# EAGLE board Tarjeta de distribuci�n (EAGLE 5.06)
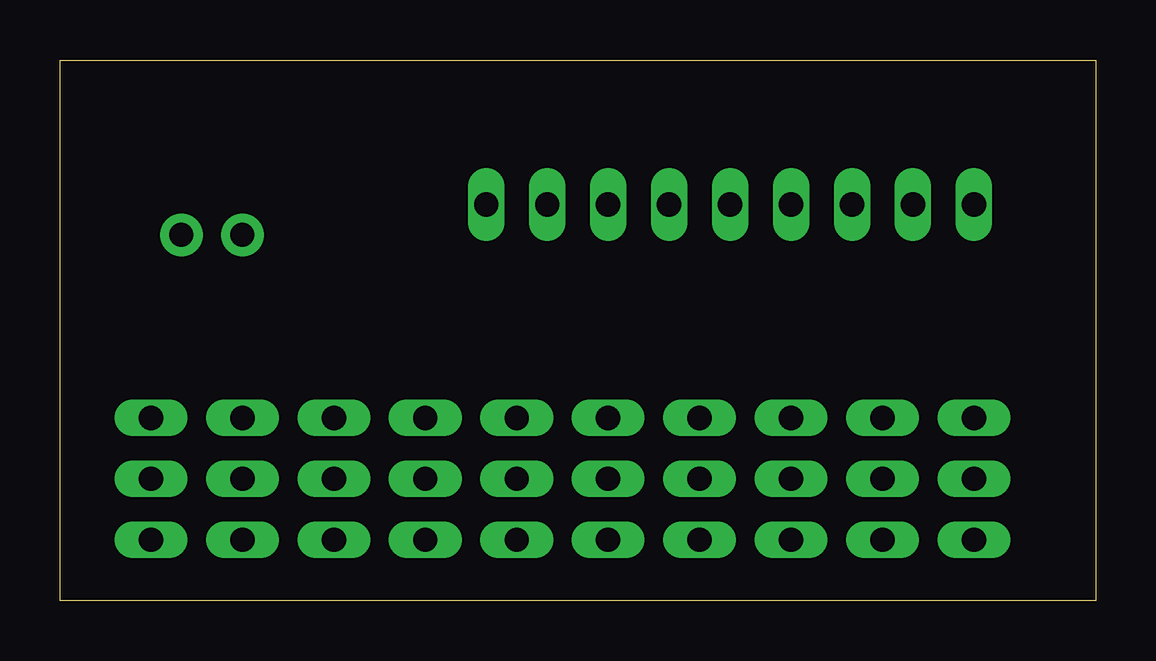
[diagram p0: board, top side]
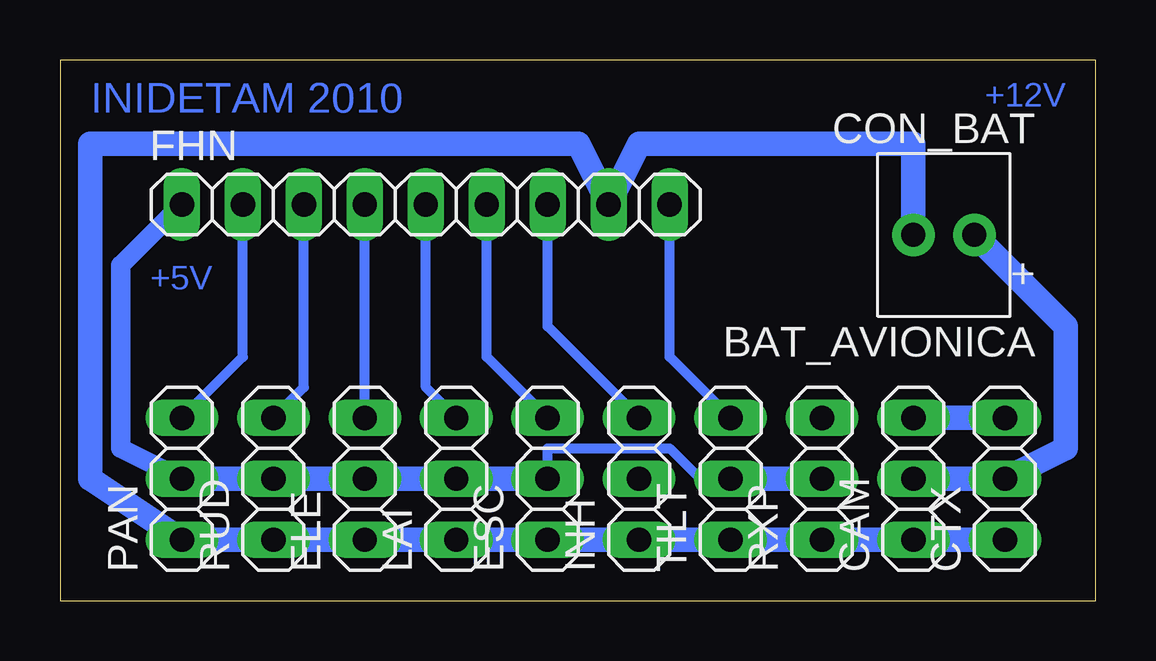
[diagram p1: board, bottom side, seen from below]

Size 43.16 x 22.53 mm. Coordinates in mm from the lower left corner, seen from the top.
Outline: 43.16,0 0,0 0,22.53 43.16,22.53 43.16,0
Copper layers (1*16): Top 0.035mm / dielectric 1.5mm / Bottom 0.035mm
Design rules "default": minimum track width 10mil, minimum drill 24mil, track to track 8mil, track to pad 8mil, pad to pad 8mil, via to via 8mil, smd to smd 8mil, copper to edge 40mil, drill to drill 8mil, minimum pad ring 10mil, minimum via ring 8mil, stop-mask expansion 4mil, vias tented up to drill 0mil, thermal gap 10mil

## Footprints (pad centres in the part's own frame; a part is rotated, then mirrored left to right if it is on the bottom)
CON_BAT = drill 1 pad 1.778 round: 1 -1.27,0; 2 1.27,0
1X03 = drill 1.016 long: 1 -2.54,0; 2 0,0; 3 2.54,0
1X09 = drill 1.016 long: 1 -10.16,0; 2 -7.62,0; 3 -5.08,0; 4 -2.54,0; 5 0,0; 6 2.54,0; 7 5.08,0; 8 7.62,0; 9 10.16,0

## Placement (x,y rotation side)
BAT_AVIONICA  CON_BAT  [CON_BAT]  6.33,15.24 180 bottom
CAM  [1X03]  7.6,5.08 90 bottom
CTX  [1X03]  3.79,5.08 90 bottom
ELE  [1X03]  30.46,5.08 90 bottom
ESC  [1X03]  22.84,5.08 90 bottom
FHN  [1X09]  27.92,16.51 0 bottom
INH  [1X03]  19.03,5.08 90 bottom
LAI  [1X03]  26.65,5.08 90 bottom
PAN  [1X03]  38.08,5.08 90 bottom
RUD  [1X03]  34.27,5.08 90 bottom
RXP  [1X03]  11.41,5.08 90 bottom
TILT  [1X03]  15.22,5.08 90 bottom

## Library data of the parts
BAT_AVIONICA = Conector bateria
CAM CTX ELE ESC FHN INH LAI PAN RUD RXP TILT = pinhead

## Nets
5VESC: ELE.2 ESC.2 FHN.1 LAI.2 PAN.2 RUD.2 RXP.2 TILT.2
12V_AVI: BAT_AVIONICA.1 CAM.2 CTX.2
GND: BAT_AVIONICA.2 CAM.1 CTX.1 ELE.1 ESC.1 FHN.8 INH.1 LAI.1 PAN.1 RUD.1 RXP.1 TILT.1
INHIBIT: FHN.7 INH.3
N$3: CAM.3 CTX.3
RCOUT_LA: FHN.5 LAI.3
RCOUT_LE: ELE.3 FHN.4
RCOUT_PAN: FHN.2 PAN.3
RCOUT_RUD: FHN.3 RUD.3
RCOUT_THR: ESC.3 FHN.6
RCOUT_TILT: FHN.9 TILT.3

## Tracks (layer width: path | path; a pad name or v marks a point on that pad's centre or on a via)
5VESC
  Bottom 0.254: 16.49,5.08 TILT.2
  Bottom 0.406: 16.49,5.08 17.76,6.35 22.84,6.35 ESC.2
  Bottom 0.813: FHN.1 40.62,13.97 40.62,6.35 PAN.2
  Bottom 1.016: TILT.2 RXP.2 | PAN.2 RUD.2 ELE.2 LAI.2 ESC.2
12V_AVI
  Bottom 1.016: CAM.2 CTX.2 1.25,6.35 1.25,11.43 BAT_AVIONICA.1
GND
  Bottom 1.016: CTX.1 CAM.1 RXP.1 TILT.1 INH.1 ESC.1 LAI.1 ELE.1 RUD.1 PAN.1 41.89,5.08 41.89,19.05 21.57,19.05 FHN.8 19.03,19.05 7.6,19.05 BAT_AVIONICA.2
INHIBIT
  Bottom 0.406: INH.3 22.84,11.43 FHN.7
N$3
  Bottom 1.016: CAM.3 CTX.3
RCOUT_LA
  Bottom 0.406: LAI.3 27.92,8.89 FHN.5
RCOUT_LE
  Bottom 0.406: ELE.3 FHN.4
RCOUT_PAN
  Bottom 0.406: PAN.3 35.54,10.16 FHN.2
RCOUT_RUD
  Bottom 0.406: RUD.3 33,8.89 FHN.3
RCOUT_THR
  Bottom 0.406: ESC.3 25.38,10.16 FHN.6
RCOUT_TILT
  Bottom 0.406: TILT.3 17.76,10.16 FHN.9

## Text on the board
Bottom: +12V | INIDETAM 2010 | +5V